# Altium PCB Lab4_Buhakova.PcbDoc
Units mil, origin at the board's own origin, x right, y up, seen from the top; angles counter-clockwise.
Board outline 5905.51 x 3740.16 mil, 2 copper layers (Top Layer, Top, Bottom Layer, Bottom); 23 components, 15 nets, 51 pads, 0 vias.
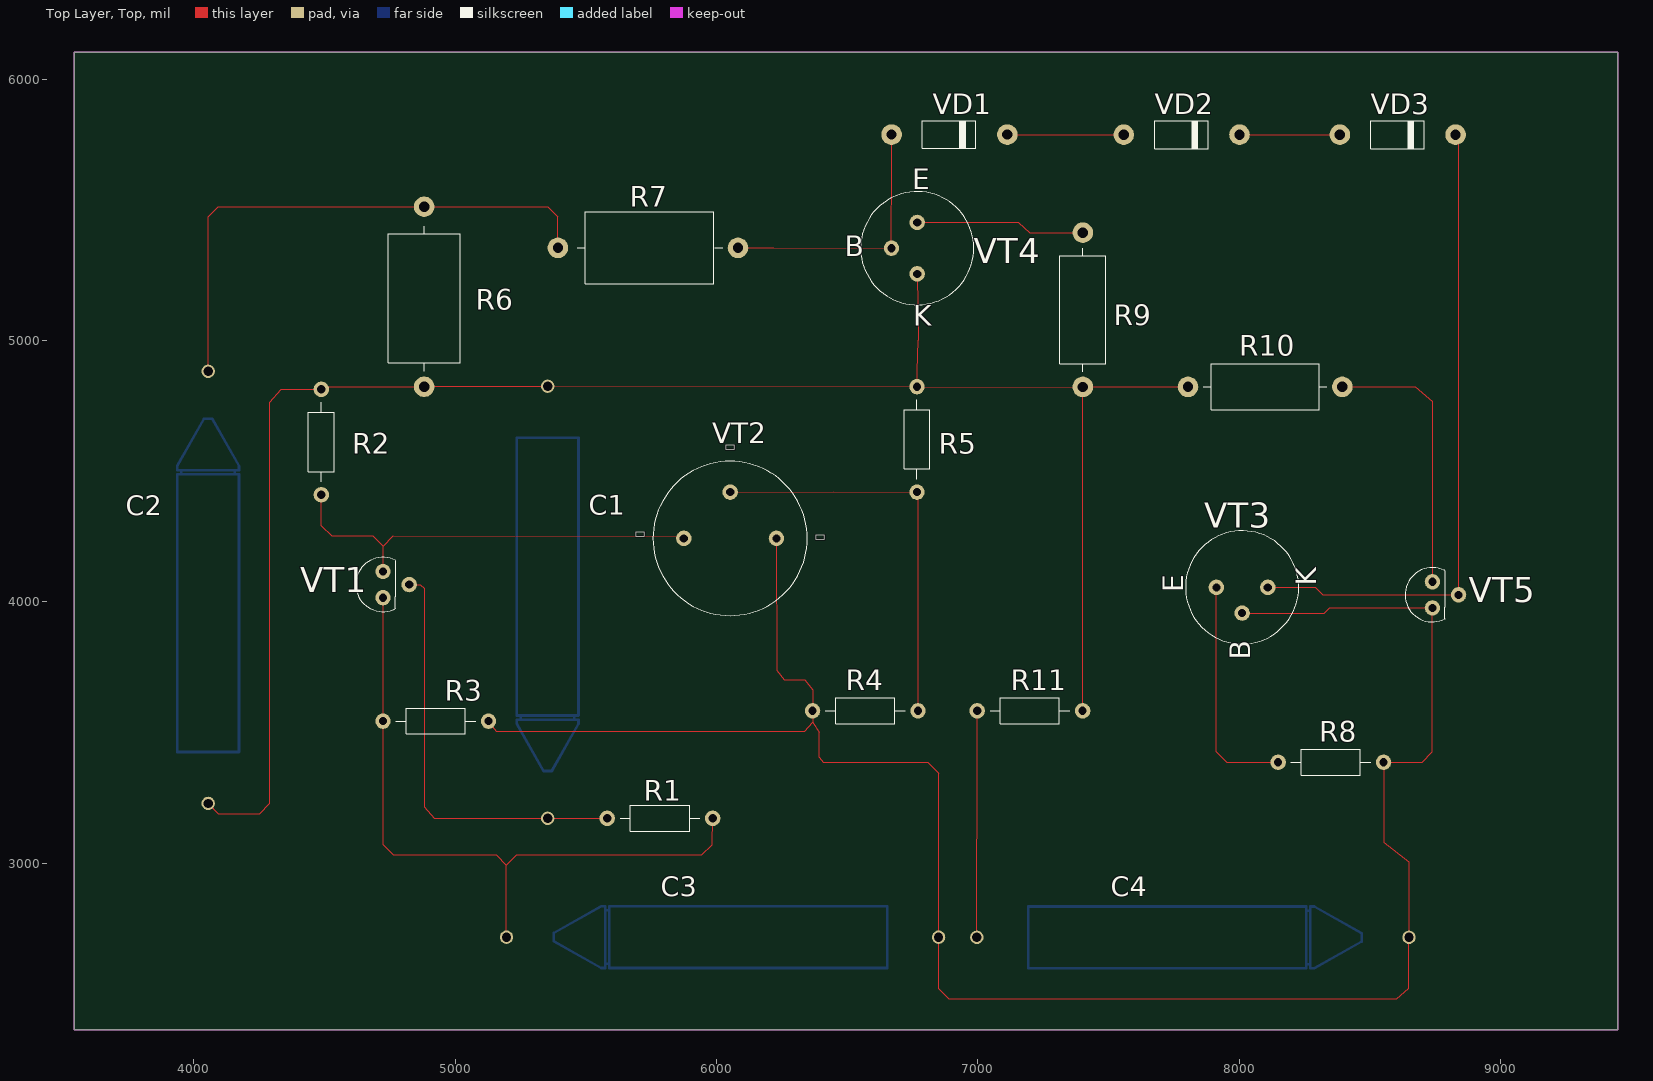
[diagram p0: Top Layer, Top view]
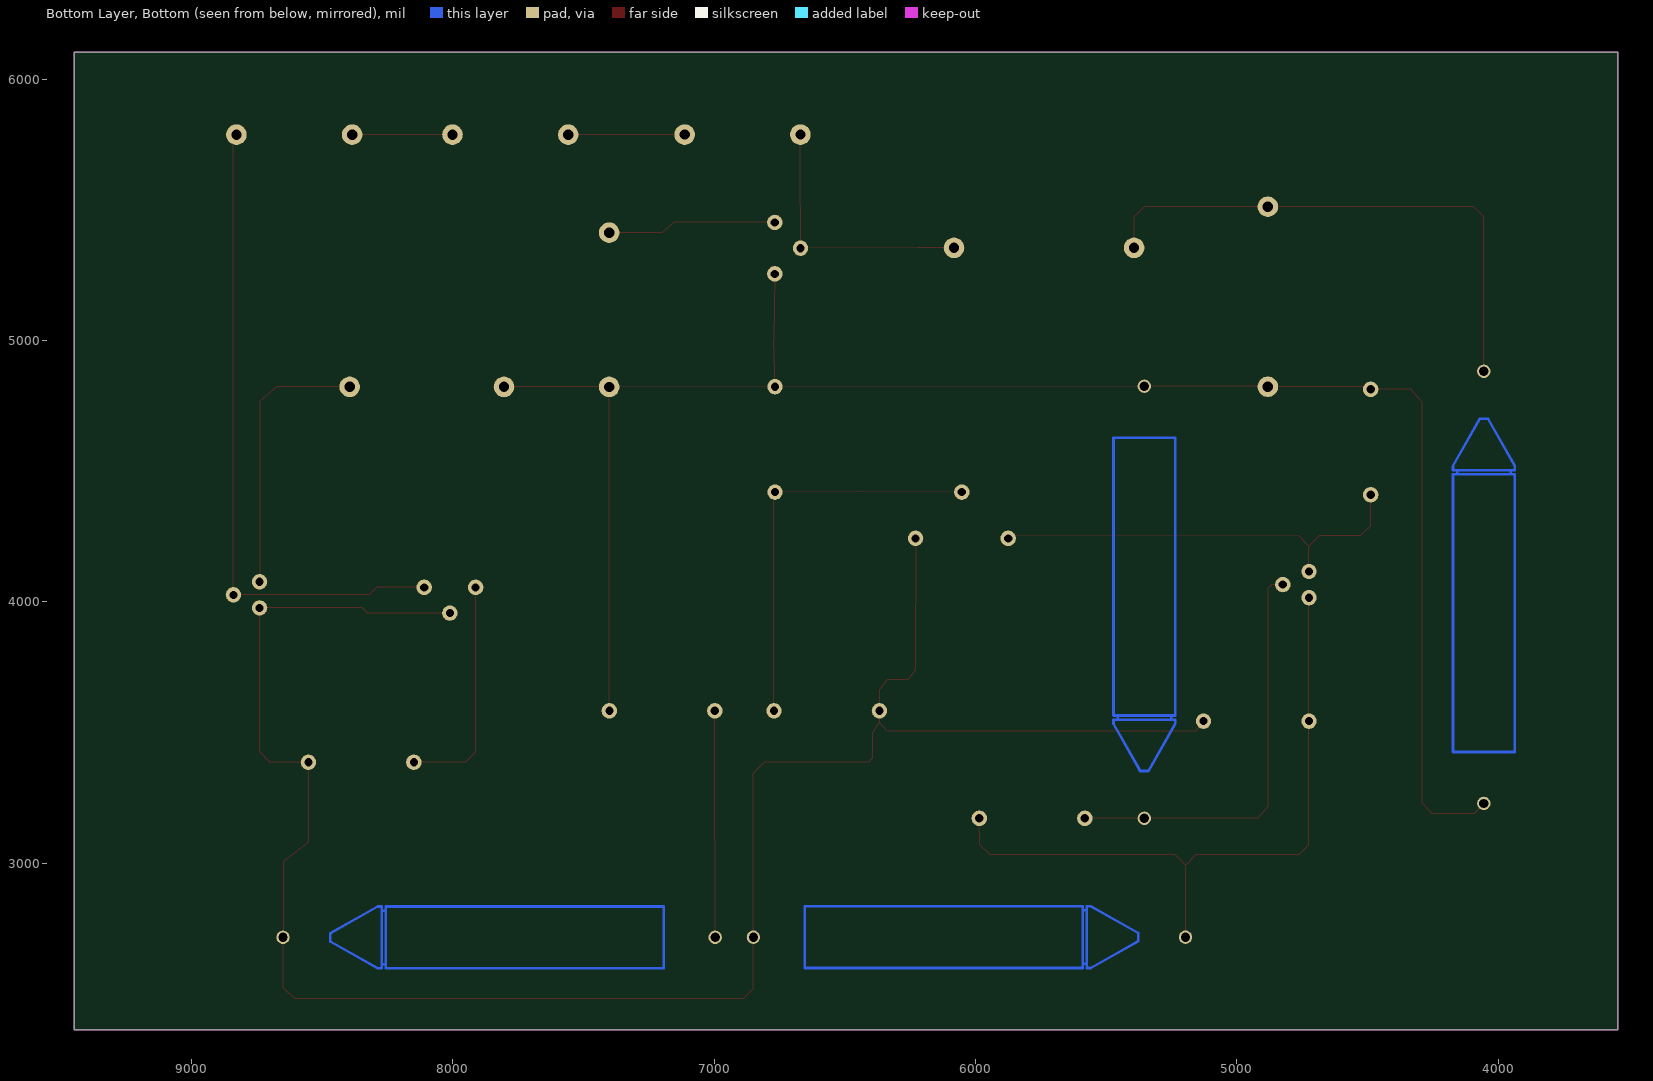
[diagram p1: Bottom Layer, Bottom view, seen from below]

## Layer stack, top to bottom
Top Solder, Top Mask: solder mask 0.4, Solder Resist, Dk 3.5
Top Layer, Top: signal copper 1.4
Dielectric 1: dielectric 12.6, FR-4, Dk 4.8
Bottom Layer, Bottom: signal copper 1.4
Bottom Solder, Bot Mask: solder mask 0.4, Solder Resist, Dk 3.5

## Board outline
3543.31,2362.2 9448.82,2362.2 9448.82,6102.36 3543.31,6102.36

## Design rules (kind name [scope] priority, off if disabled: settings)
Clearance [All] p1: gap=10 ignorepadtopadclearanceinfootprint=FALSE except(11.81: Arc-Arc Arc-Track Arc-THPad Arc-Via Track-Track Track-THPad Track-Via THPad-THPad THPad-Via Via-Via)
PlaneClearance [All] p1: clearance=10
PolygonConnect [All] p1: connectstyle=Relief reliefconductorwidth=10 reliefentries=4 polygonreliefangle="90 Angle" airgapwidth=10
RoutingVias [All] p1: holewidth=28 width=50 viastyle="Through Hole" minholewidth=28 minwidth=50 maxholewidth=28 maxwidth=50
SolderMaskExpansion [All] p1: expansion=4 istentingtop=FALSE
Width [All] p1: maxlimit=10 minlimit=10 preferedwidth=10
29 further rules are at their usual default settings.

## Components (designator, comment, footprint, x,y, rotation, side; value= is the part's Value field where it differs from the comment)
C1 "10�Fx25V" K50_29 5354.33,4824.8 r270 top
C2 "" K50_29 4055.12,3228.35 r90 top
C3 "" K50_29 6850.39,2716.54 r180 top
C4 "" K50_29 6996.85,2715.75 r0 top
R1 "27K" C2-33H-0.125W_10MM 5985.83,3171.26 r180 top
R2 "" C2-33H-0.125W_10MM 4488.19,4409.45 r90 top
R3 "" C2-33H-0.125W_10MM 4724.41,3543.31 r0 top
R4 "" C2-33H-0.125W_10MM 6771.65,3582.68 r180 top
R5 "" C2-33H-0.125W_10MM 6767.72,4419.69 r90 top
R6 "" C2-33H-1W_17.5MM 4881.89,5511.81 r270 top
R7 "" C2-33H-1W_17.5MM 5393.7,5354.33 r0 top
R8 "" C2-33H-0.125W_10MM 8149.61,3385.83 r0 top
R9 "" C2-33H-0.5W_15MM 7402.36,5412.6 r270 top
R10 "" C2-33H-0.5W_15MM 7804.72,4822.44 r0 top
R11 "" C2-33H-0.125W_10MM 7401.57,3582.68 r180 top
VD1 "" DO-41(DO-204AL)_1N4007(Primary) 6670.47,5787.8 r180 top
VD2 "" DO-41(DO-204AL)_1N4007(Primary) 7559.06,5787.4 r180 top
VD3 "" DO-41(DO-204AL)_1N4007(Primary) 8385.83,5787.4 r180 top
VT1 "" TO-92-4_BC558B(Primary) 4724.41,4015.75 r90 top
VT2 "" 2T602A 6052.76,4419.69 r90 top
VT3 "" ��101 7913.39,4055.12 r90 top
VT4 "" ��101 6768.5,5451.57 r0 top
VT5 "" TO-92-4_BC558B(Primary) 8740.16,3976.38 r90 top

## Footprints (in the part's own frame and the unit in brackets; to place one, negate y for a bottom-side part, rotate by r counter-clockwise, add the part's x,y. Pads: shape width x height; smd on the part's side, far side on the other; paste and mask are expansions set on the pad)
2T602A [mm]
  round 1.5 hole 0.8: 1(-4.5,-4.5) 2(0,0) 3(-4.5,4.5)
  silkscreen extent -12,-7.5 3,7.5
C2-33H-0.5W_15MM [mm]
  round 2 hole 1: 1(0,0) 2(15,0)
  silkscreen extent 1.5,-2.25 13.5,2.25
C2-33H-0.125W_10MM [mm]
  round 1.5 hole 0.8: 1(0,0) 2(10.25,0)
  silkscreen extent 1.25,-1.25 9,1.25
C2-33H-1W_17.5MM [mm]
  round 2 hole 1: 1(0,0) 2(17.5,0)
  silkscreen extent 1.9,-3.5 16,3.5
DO-41(DO-204AL)_1N4007(Primary) [mm]
  round 2 hole 1: A(0,0) K(-11.25,0)
  silkscreen extent -8.2,-1.35 -3,1.35
K50_29 [mm]
  round 1.3 hole 0.9 unplated: 1(0,0) 2(42,0)
  Bottom Layer, Bottom lines w0.254: 32.4,-2.6 32,-2.6 ; 32.4,2.6 32,2.6 ; 32.8,-3 37.4,-0.4 37.4,0.4 32.8,3 32.4,3 32.4,-3 32.8,-3 ; 32,-3 5,-3 5,3 32,3 32,-3
TO-92-4_BC558B(Primary) [mm]
  round 1.5 hole 0.8: B(1.27,-2.54) C(0,0) E(2.54,0)
  silkscreen extent -1.35,-1.24 3.92,2.65
��101 [mm]
  round 1.5 hole 0.8: 1(0,0) 2(-2.5,-2.5) 3(0,-5)
  silkscreen extent -5.5,-8 5.5,3

## Nets (pads, with @x,y where several pads share a name; then routed paths per layer and width w, separated by ;. In a path a pad name is that pad's centre, name@x,y a point inside that pad or via, vN(x,y) a via of type N, cw(c..) or ccw(c..) an arc to the next point about the centre after c; other vN are vias at no path point)
GND: C3.1 C4.2 R3.2 R4.2 R8.2 VT2.1 VT3.2 VT5.C | length 7805.6
  Top Layer, Top w3.94: R3.2 5157.48,3503.94 6338.58,3503.94 6368.11,3539.76 6368.5,3539.76 ; VT2.1 6230.31,3738.58 6259.84,3700.79 6338.58,3700.79 6368.11,3663.39 6368.5,3539.76 ; R4.2 6368.5,3539.76 ; VT3.2 8325.59,3956.69 8347.64,3976.38 VT5.C 8740.16,3425.2 8700.79,3385.83 R8.2 8553.15,3080.71 8649.61,3005.91 C4.2 8649.61,2521.65 8604.33,2480.32 6889.76,2480.32 6850.39,2519.68 C3.1 6850.39,3344.49 6809.06,3385.83 6409.06,3385.83 6392.91,3404.33 6392.91,3501.18 6368.5,3539.76
NET00000: C3.2 R1.1 R3.1 VT1.C | length 2646
  Top Layer, Top w3.94: VT1.C R3.1 4724.41,3070.87 4763.78,3031.5 5157.48,3031.5 5196.85,2992.13 ; C3.2 5196.85,2992.13 ; R1.1 5984.25,3070.87 5944.88,3031.5 5236.22,3031.5 5196.85,2992.13
NET00001: C1.2 R1.2 VT1.B | length 1618.6
  Top Layer, Top w3.94: VT1.B 4867.72,4065.35 4881.89,4051.57 4882.28,3216.14 4919.69,3172.44 C1.2 R1.2
NET00004: R4.1 R5.1 VT2.2 | length 1553.1
  Top Layer, Top w3.94: VT2.2 6448.82,4420.08 R5.1 6772.44,4410.24 R4.1
NET00006: R2.1 VT1.E VT2.3 | length 1654.1
  Top Layer, Top w3.94: R2.1 4488.19,4291.34 4527.56,4251.97 4685.04,4251.97 4724.41,4212.6 ; VT1.E 4724.41,4212.6 ; VT2.3 5863.78,4251.18 4763.78,4251.97 4724.41,4212.6
NET00008: R7.2 VD1.A VT4.2 | length 1022
  Top Layer, Top w3.94: R7.2 6220.47,5354.33 VT4.2 6670.47,5681.1 VD1.A
NET00010: C2.2 R6.1 R7.1 | length 2079.9
  Top Layer, Top w3.94: C2.2 4055.12,5472.44 4094.49,5511.81 R6.1 5354.33,5511.81 5393.7,5472.44 R7.1
NET00013: R9.1 VT4.1 | length 648.8
  Top Layer, Top w3.94: VT4.1 7155.12,5451.57 7198.43,5412.6 R9.1
NET00014: VD1.K VD2.A | length 445.7
  Top Layer, Top w3.94: VD1.K 7440.94,5787.4 VD2.A
NET00015: VD2.K VD3.A | length 383.9
  Top Layer, Top w3.94: VD2.K VD3.A
NET00017: C4.1 R11.2 | length 866.9
  Top Layer, Top w3.94: C4.1 6998.03,3468.5 R11.2
NET00018: R10.2 VT5.E | length 1054.9
  Top Layer, Top w3.94: R10.2 8675.2,4822.83 8738.58,4766.54 VT5.E
NET00019: VD3.K VT3.3 VT5.B | length 2510.4
  Top Layer, Top w3.94: VT3.3 8292.52,4055.12 8320.08,4026.38 VT5.B 8840.94,5780.71 VD3.K
NET00020: R8.1 VT3.1 | length 882.4
  Top Layer, Top w3.94: VT3.1 7913.39,3425.2 7952.76,3385.83 R8.1
VCC: C1.1 C2.1 R2.2 R5.2 R6.2 R9.2 R10.1 R11.1 VT4.3 | length 7030.8
  Top Layer, Top w3.94: C2.1 4094.49,3188.98 4251.97,3188.98 4291.34,3228.35 4291.34,4763.78 4334.65,4812.99 R2.2 4507.87,4822.83 R6.2 4911.42,4825.2 C1.1 5366.14,4824.02 R5.2 ; VT4.3 6771.65,5000 R5.2 ; R11.1 7401.57,4488.19 R9.2 ; R10.1 7393.7,4822.83 R9.2 ; R5.2 6785.43,4820.87 R9.2

## Keep-outs
Keep-Out Layer, Board:
  the board outline again, w5

## Text inside footprints (layer, text, board x,y; h text height)
VT2: Top Overlay, Top Silk "�" at 6082.28,4567.32 h59.06 r90; Top Overlay, Top Silk "�" at 5737.8,4232.68 h59.06 r90; Top Overlay, Top Silk "�" at 6426.77,4222.83 h59.06 r90; Mechanical 1, Top Assy "�" at 6082.28,4567.32 h59.06 r90; Mechanical 1, Top Assy "�" at 5737.8,4232.68 h59.06 r90; Mechanical 1, Top Assy "�" at 6426.77,4222.83 h59.06 r90
VT3: Top Overlay, Top Silk "K" at 8295.77,4061.9 h78.12 r90; Top Overlay, Top Silk "E" at 7786.52,4036.33 h78.12 r90; Top Overlay, Top Silk "B" at 8042.42,3778.83 h78.12 r90; Mechanical 1, Top Assy "E" at 7786.52,4036.33 h78.12 r90; Mechanical 1, Top Assy "B" at 8042.42,3778.83 h78.12 r90
VT4: Top Overlay, Top Silk "E" at 6749.72,5578.44 h78.12; Top Overlay, Top Silk "K" at 6753.04,5056.79 h78.12; Top Overlay, Top Silk "B" at 6492.21,5322.54 h78.12; Mechanical 1, Top Assy "E" at 6749.72,5578.44 h78.12; Mechanical 1, Top Assy "K" at 6753.04,5056.79 h78.12; Mechanical 1, Top Assy "B" at 6492.21,5322.54 h78.12